# Altium PCB PCB1 - 副本.PcbDoc
Units mil, origin at the board's own origin, x right, y up, seen from the top; angles counter-clockwise.
Board outline 2598.43 x 944.88 mil, 2 copper layers (Top Layer, Bottom Layer); 28 components, 17 nets, 61 pads, 0 vias.
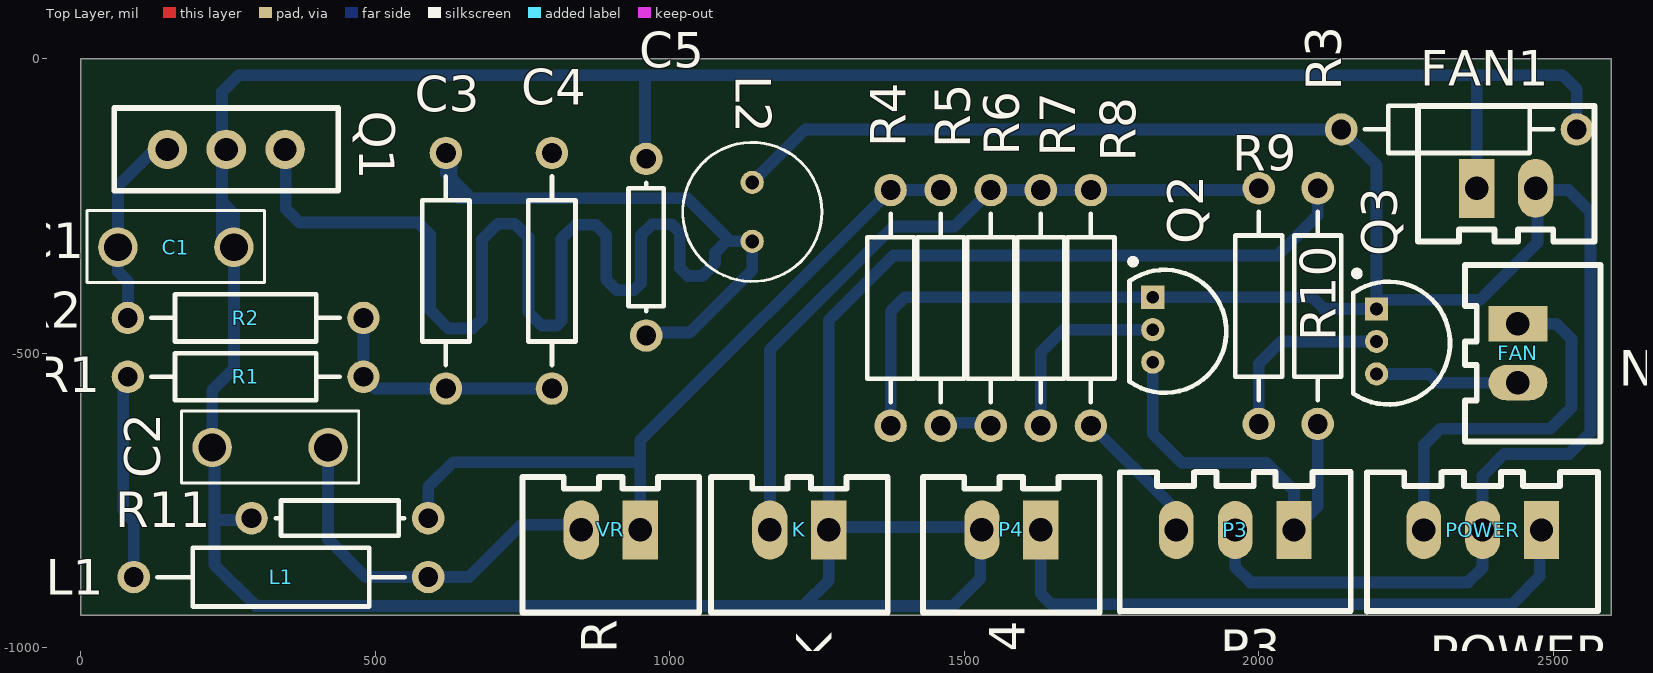
[diagram p0: Top Layer view]
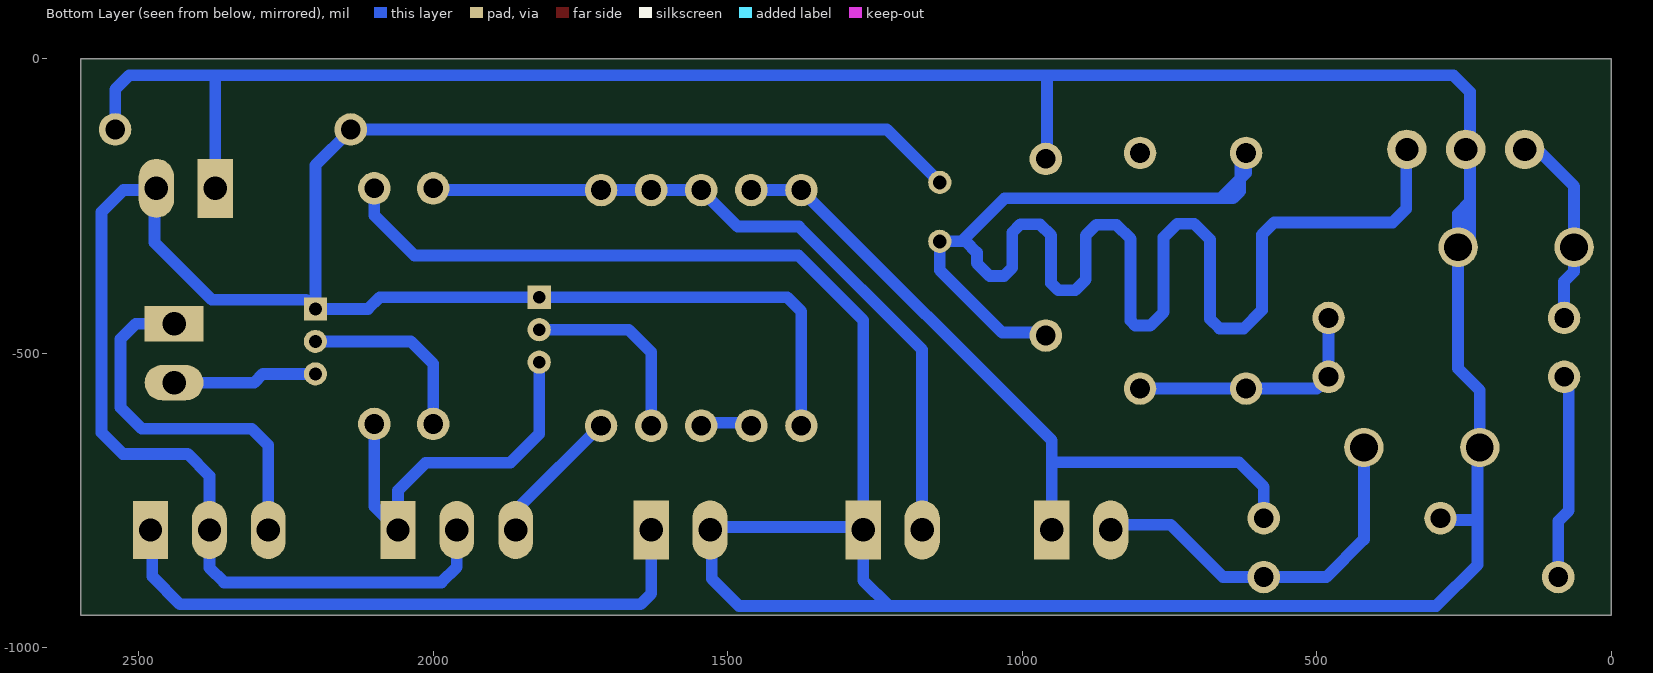
[diagram p1: Bottom Layer view, seen from below]

## Layer stack, top to bottom
Top Layer: signal copper 1.4
Dielectric: dielectric 12.6, FR-4, Dk 4.8
Bottom Layer: signal copper 1.4

## Board outline
0,-944.88 2598.43,-944.88 2598.43,0 0,0

## Design rules (kind name [scope] priority, off if disabled: settings)
Clearance [All] p1: gap=10
PolygonConnect [All] p1: connectstyle=Relief reliefconductorwidth=10 reliefentries=4 polygonreliefangle="90 Angle"
RoutingVias [All] p1: holewidth=28 width=50 viastyle="Through Hole" minholewidth=28 minwidth=50 maxholewidth=28 maxwidth=50
SilkscreenOverComponentPads [All] p1: minsilkscreentomaskgap=10
SolderMaskExpansion [All] p1: expansion=4
Width [All] p1: maxlimit=200 minlimit=10 preferedwidth=10
27 further rules are at their usual default settings.

## Components (designator, comment, footprint, x,y, rotation, side; value= is the part's Value field where it differs from the comment)
C1 "47nF/100V" CAP_5MM 260,-320 r180 top (schematic designator C3)
C2 "47nF/100V" CAP_5MM 420,-660 r180 top (schematic designator C4)
C3 "47nF/100V" AXIAL-0.4 620,-360 r90 top (schematic designator C2)
C4 "47nF/100V" AXIAL-0.4 800,-360 r90 top (schematic designator C1)
C5 "47nF/100V" AXIAL-0.3 960,-320 r90 top (schematic designator C17)
FAN "Header 2" SIP-2L 2440,-500 r270 top (schematic designator P1)
FAN1 "Header 2" SIP-2L 2420,-220 r0 top (schematic designator P7)
K "Header 2" SIP-2L 1220,-800 r180 top (schematic designator P5)
L1 "270uH" AXIAL-0.5 340,-880 r0 top
L2 "270uH" 6*8 1140,-260 r270 top
P3 "Header 3" SIP-3L 2060,-800 r180 top
P4 "Header 2" SIP-2L 1580,-800 r180 top
POWER "Header 3" SIP-3L 2480,-800 r180 top (schematic designator P2)
Q1 "BU406" to220 147,-154 r0 top (schematic designator Q10)
Q2 "S9013" TO-92 1820,-460 r90 top (schematic designator Q1)
Q3 "S9013" TO-92 2200,-480 r90 top (schematic designator Q8)
R1 "Res Semi" AXIAL-0.4 280,-540 r180 top (schematic designator R8)
R2 "Res Semi" AXIAL-0.4 280,-440 r180 top (schematic designator R9)
R3 "Res Semi" AXIAL-0.4 2340,-120 r180 top
R4 "Res Semi" AXIAL-0.4 1375,-423 r90 top (schematic designator R7)
R5 "Res Semi" AXIAL-0.4 1460,-423 r90 top (schematic designator R6)
R6 "Res Semi" AXIAL-0.4 1545,-423 r90 top (schematic designator R5)
R7 "Res Semi" AXIAL-0.4 1630,-423 r90 top (schematic designator R4)
R8 "Res Semi" AXIAL-0.4 1715,-423 r90 top (schematic designator R3)
R9 "Res Semi" AXIAL-0.4 2000,-420 r90 top (schematic designator R2)
R10 "Res Semi" AXIAL-0.4 2100,-420 r90 top (schematic designator R1)
R11 "Res Semi" AXIAL-0.3 440,-780 r180 top
VR "Header 2" SIP-2L 900,-800 r180 top (schematic designator P6)

## Footprints (in the part's own frame and the unit in brackets; to place one, negate y for a bottom-side part, rotate by r counter-clockwise, add the part's x,y. Pads: shape width x height; smd on the part's side, far side on the other; paste and mask are expansions set on the pad)
6*8 [mm]
  round 1 hole 0.6: 1(1.27,0) 2(-1.27,0)
  silkscreen extent -3,-3 3,3
AXIAL-0.3 [mm] "Axial Device, Thru-Hole; 2 Leads; 0.3 in Pin Spacing"
  round 1.4 hole 0.85: 1(-3.81,0) 2(3.81,0)
  silkscreen extent -2.77,-0.76 2.77,0.76
AXIAL-0.4 [mm] "Axial Device, Thru-Hole; 2 Leads; 0.4 in Pin Spacing"
  round 1.4 hole 0.85: 1(-5.08,0) 2(5.08,0)
  silkscreen extent -4.06,-1.02 4.06,1.02
AXIAL-0.5 [mm] "Axial Device, Thru-Hole; 2 Leads; 0.5 in Pin Spacing"
  round 1.4 hole 0.85: 1(-6.35,0) 2(6.35,0)
  silkscreen extent -5.33,-1.27 5.33,1.27
CAP_5MM [mm]
  round 1.7 hole 1.2: 1(0,0) 2(5,0)
  silkscreen extent -1.32,-1.57 6.32,1.52
SIP-2L [mil]
  rect 60x100 hole 40: 1(-50,0)
  oval 60x100 hole 40: 2(50,0)
  silkscreen extent -150,-90 150,140
SIP-3L [mm]
  rect 1.5x2.5 hole 1: 1(0,0)
  oval 1.5x2.5 hole 1: 2(2.54,0) 3(5.08,0)
  silkscreen extent -2.44,-2.5 7.52,3.51
to220 [mm]
  round 1.7 hole 1: 1(0,0) 2(2.54,0) 3(5.08,0)
  silkscreen extent -2.29,-1.78 7.37,1.78
TO-92 [mm]
  rect 1x1 hole 0.55: 1(1.4,0)
  round 1 hole 0.55: 2(0,0) 3(-1.4,0)
  silkscreen extent -2.72,-3.17 3.06,1

## Part data
C1 C2 C3 C4 C5: library part Cap, "Capacitor"
FAN FAN1 K P4 VR: "Header, 2-Pin"
L1 L2: library part Inductor, "Inductor"
P3 POWER: "Header, 3-Pin"
Q1 Q2 Q3: library part NPN, "NPN Bipolar Transistor"
R1 R2 R3 R4 R5 R6 R7 R8 R9 R10 R11: "Semiconductor Resistor"

## Nets (pads, with @x,y where several pads share a name; then routed paths per layer and width w, separated by ;. In a path a pad name is that pad's centre, name@x,y a point inside that pad or via, vN(x,y) a via of type N, cw(c..) or ccw(c..) an arc to the next point about the centre after c; other vN are vias at no path point)
NewNet1: C1.1 C2.2 C5.2 FAN1.1 K.1 P4.2 Q1.2 R3.1 R10.2 R11.2 | length 6854
  Bottom Layer w5: C2.2 C2.2@227,-656.15
  Bottom Layer w20: C2.2 223.15,-562.85 260,-526 C1.1@260,-323 ; C2.2@227,-656.15 227,-660 227,-780 ; C1.1@265,-328 C1.1@260,-323 ; R11.2@298,-783 290,-783 230,-783 227,-780 ; C5.2 958,-168 958,-28 ; P4.2@1523,-795 K.1@1275,-795 ; P4.2@1527,-810 1527,-883 1481,-929 1227,-929 ; R10.2 2100,-266 2032,-334 1380,-334 1270,-444 1270,-790 K.1@1275,-795 ; FAN1.1 2370,-29 2369,-28 ; R3.1 2540,-52 2516,-28 2369,-28 ; 227,-780 227,-859 297,-929 1227,-929 ; 240,-243 240,-303 258.5,-321.5 C1.1@260,-323 ; 240,-243 240,-160 240,-56 268,-28 958,-28 ; 240,-243 260,-263 C1.1 C1.1@260,-323 ; 958,-28 2369,-28 ; 1227,-929 1270,-886 K.1 K.1@1275,-795
NewNet2: R4.2 R5.2 R11.1 VR.1 | length 1268.4
  Bottom Layer w20: R11.1 590,-727 632,-685 950,-685 ; VR.1 950,-685 ; R5.2 R4.2 950,-648 950,-685
NewNet3: C3.1 C4.1 R1.1 R2.1 | length 428.3
  Bottom Layer w20: R2.1 R1.1 500,-560 C3.1 C4.1
NewNet4: C3.2 C5.1 L2.1 Q1.3 | length 2729.4
  Bottom Layer w20: Q1.3@348,-155 348,-160 348,-255 371,-278 572,-278 593,-299 593,-427 624,-458 665,-458 681,-442 681,-307 708,-280 737,-280 760,-303 760,-430 783,-453 808,-453 816,-445 816,-306 840,-282 874,-282 892,-300 892,-375 910,-393 939,-393 951,-381 951,-300 970,-281 1003,-281 1017,-295 1017,-355 1031,-369 1055,-369 1077,-347 1077,-329 1096,-310 1103,-310 ; C3.2 620,-194 630,-204 ; C3.2@630,-170 630,-204 ; C5.1@954,-465 960,-465 1034,-465 1140,-359 L2.1 1103,-310 ; 630,-204 663,-237 ; 630,-204 630,-225 642,-237 663,-237 ; 663,-237 1030,-237 1103,-310
NewNet5: P3.1 Q2.3 R10.1 | length 665.2
  Bottom Layer w20: Q2.3 1820,-637 1869,-686 2012.93,-686 2060,-733.07 P3.1 2100,-760 R10.1
NewNet6: Q3.2 R9.1 | length 317.7
  Bottom Layer w20: R9.1 2000,-518 2038,-480 Q3.2
NewNet7: K.2 R6.2 R7.2 R8.2 R9.2 | length 1257.3
  Bottom Layer w20: K.2 1170,-494 1379,-285 1483,-285 R6.2 R7.2 R8.2 2000,-223 R9.2@2009,-223
NewNet8: P3.3 R8.1 | length 223.7
  Bottom Layer w20: R8.1 1716,-623 1853,-760 P3.3@1853,-789
NewNet9: Q2.2 R7.1 | length 330.7
  Bottom Layer w20: R7.1 1630,-498 1668,-460 Q2.2
NewNet10: R5.1 R6.1 | length 101.1
  Bottom Layer w20: R5.1 1465,-618 1545,-618 R6.1@1559,-618
NewNet11: FAN1.2 L2.2 P3.2 POWER.2 Q2.1 Q3.1 R3.2 R4.1 | length 4171
  Bottom Layer w20: L2.2 1230,-120 R3.2 2140,-121 2200,-181 Q3.1 ; R4.1 1375,-429 1399.12,-404.88 Q2.1 2090.88,-404.88 2110.88,-424.88 Q3.1 ; P3.2 1960,-863 1986,-889 2355,-889 2380,-864 POWER.2 2380,-708 2417,-671 2527,-671 2563,-635 2563,-260 2526,-223 FAN1.2@2473,-223 ; FAN1.2 FAN1.2@2473,-223 ; Q3.1 2215.88,-409 2376,-409 2473,-312 FAN1.2@2473,-223
NewNet12: C1.2 Q1.1 R2.2 | length 330.5
  Bottom Layer w20: R2.2 80,-378 63.15,-361.15 C1.2 63.15,-216.85 120,-160 Q1.1@140,-160
NewNet13: L1.1 R1.2 | length 343.5
  Bottom Layer w20: R1.2@72,-544 72,-767 90,-785 L1.1
NewNet14: C2.1 L1.2 VR.2 | length 651.9
  Bottom Layer w20: C2.1@426,-666 C2.1 420,-816 484,-880 L1.2 659,-880 748,-791 VR.2@844,-791
NewNet15: FAN.1 POWER.3 | length 639.3
  Bottom Layer w20: POWER.3 2280,-656 2308,-628 2495,-628 2531,-592 2531,-476 2505,-450 FAN.1
NewNet16: P4.1 POWER.1 | length 1068.9
  Bottom Layer w20: P4.1 1630,-908 1648,-926 2430,-926 2477,-879 2477,-800 POWER.1@2477,-792
NewNet17: FAN.2 Q3.3 | length 246.2
  Bottom Layer w20: Q3.3 2289.12,-535.12 2304,-550 FAN.2
pads on no net: C4.2

## Silkscreen, mask and mechanical layers (free items; w line width, h text height)
Mechanical 1:
  the board outline again, w5